# Altium PCB PCB1.PcbDoc
Units mm, origin at the board's own origin, x right, y up, seen from the top; angles counter-clockwise.
Board outline 57.53 x 48.39 mm, 2 copper layers (Top Layer, Bottom Layer); 25 components, 35 nets, 121 pads, 34 vias.
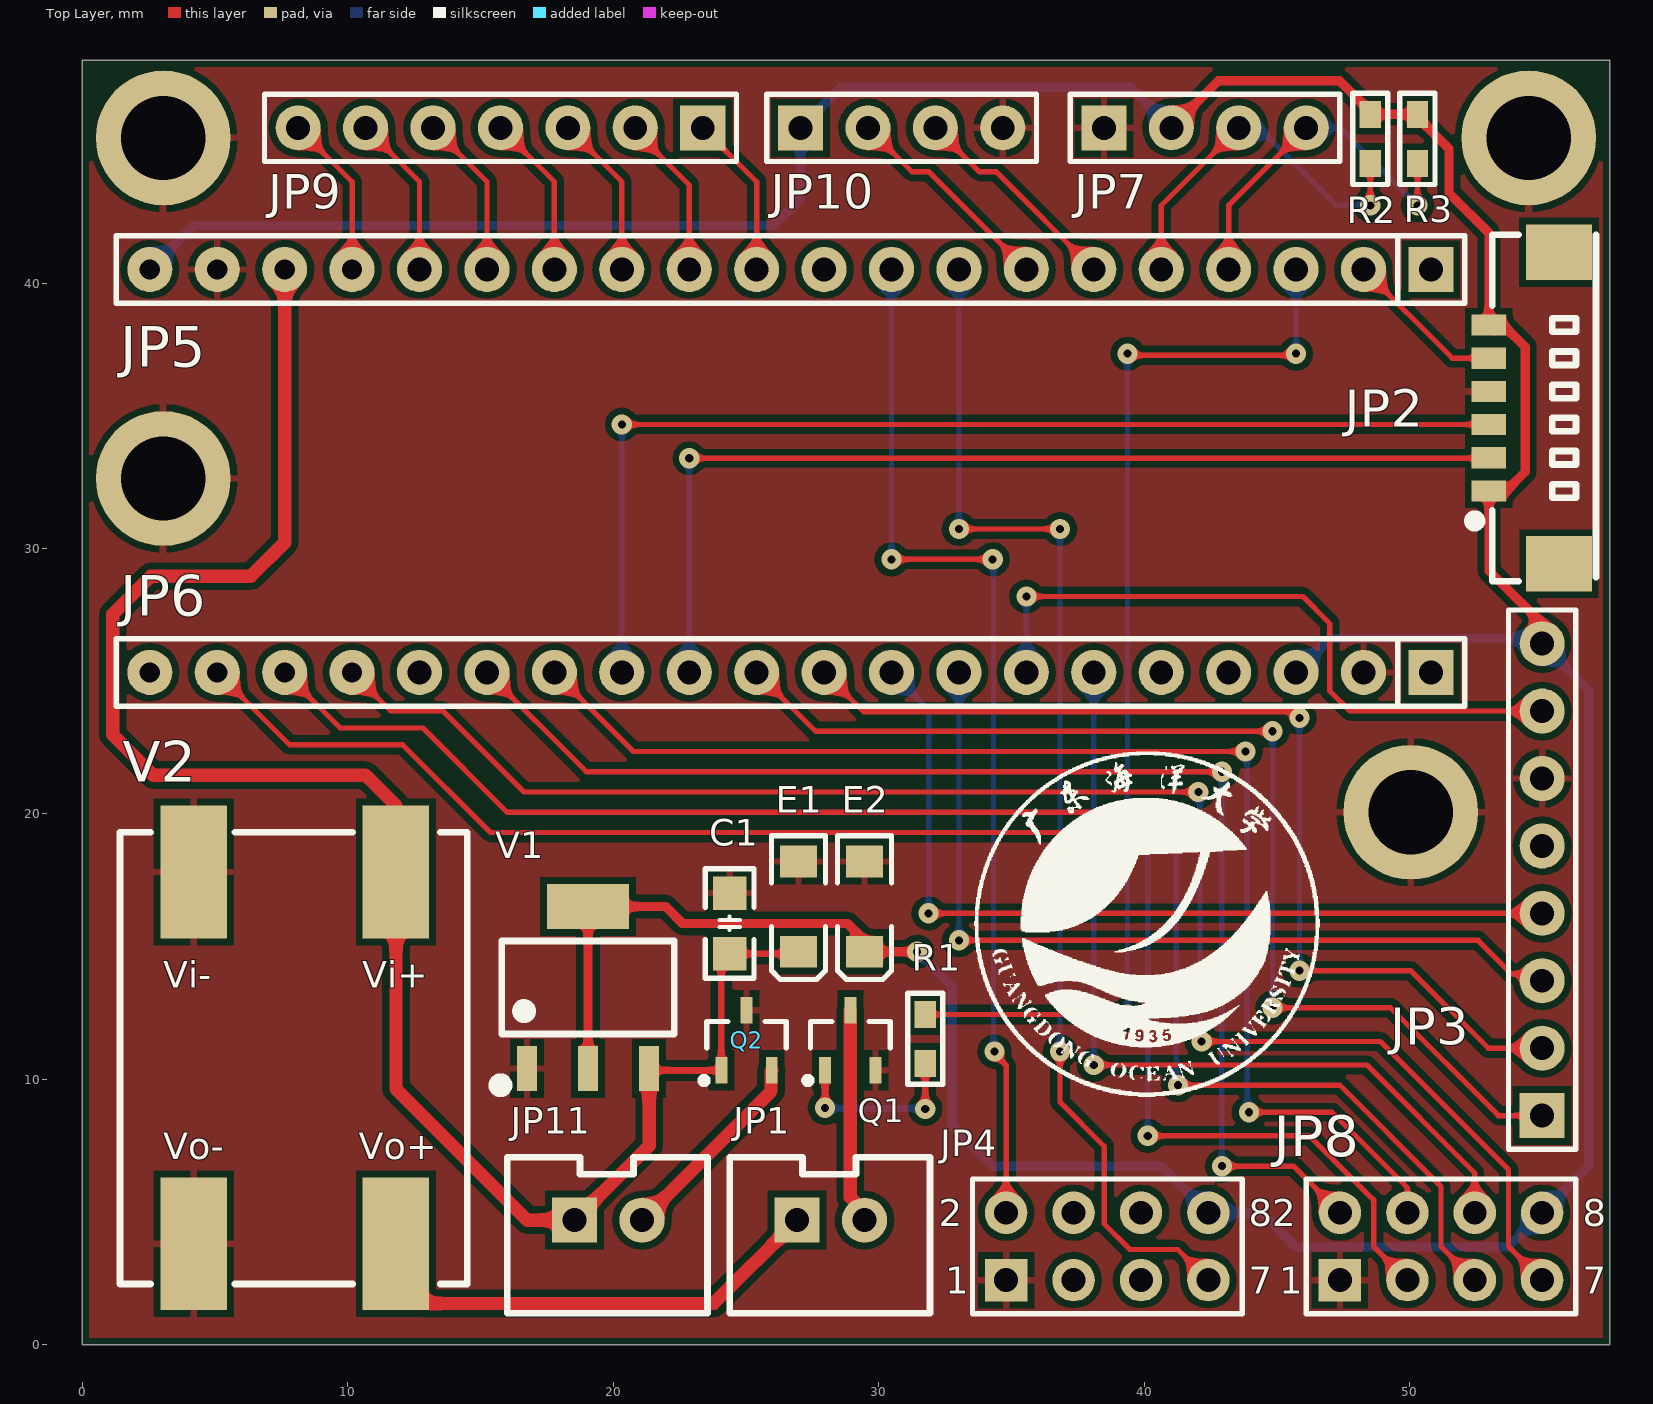
[diagram p0: Top Layer view]
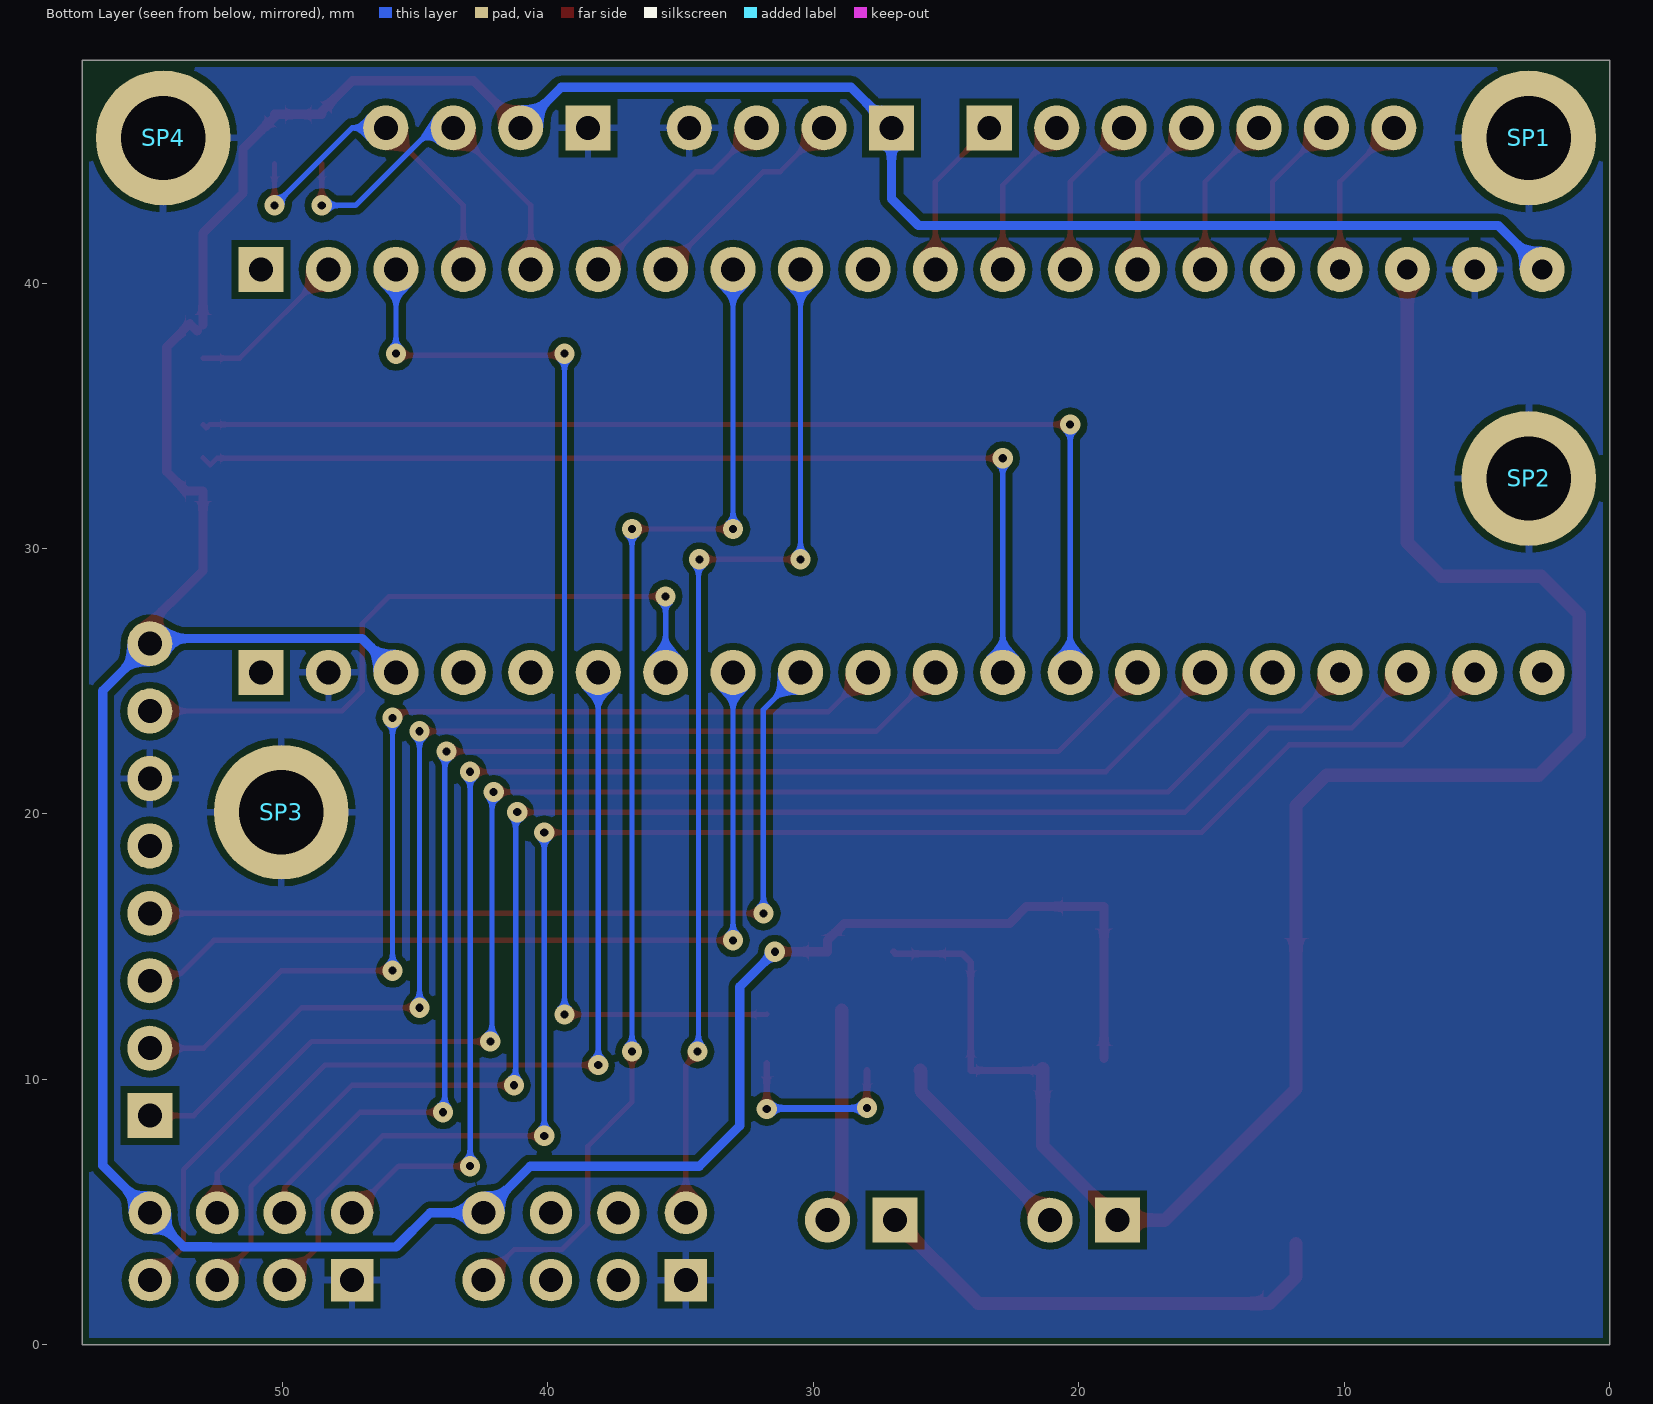
[diagram p1: Bottom Layer view, seen from below]

## Layer stack, top to bottom
Top Solder: solder mask 0.0102, Solder Resist, Dk 3.5
Top Layer: signal copper 0.0356
Dielectric 1: dielectric 0.32, FR-4, Dk 4.8
Bottom Layer: signal copper 0.0356
Bottom Solder: solder mask 0.0102, Solder Resist, Dk 3.5

## Board outline
0,0 57.531,0 57.531,48.387 0,48.387

## Design rules (kind name [scope] priority, off if disabled: settings)
BoardOutlineClearance [All] p1: gap=0.254 ignorepadtopadclearanceinfootprint=FALSE except(0: Arc-SplitContinuation Track-SplitContinuation SMDPad-SplitContinuation THPad-SplitContinuation Via-SplitContinuation Fill-SplitContinuation Poly-SplitContinuation Region-SplitContinuation Text-SplitContinuation)
Clearance [All] p1: gap=0.254 ignorepadtopadclearanceinfootprint=FALSE except(0: Arc-Hole Track-Hole SMDPad-Hole THPad-Hole Via-Hole Fill-Hole Poly-Hole Region-Hole Text-Hole)
PolygonConnect [All] p1: connectstyle=Relief reliefconductorwidth=0.254 reliefentries=4 polygonreliefangle="90 Angle" airgapwidth=0.254
RoutingVias [All] p1: holewidth=0.711 width=1.27 viastyle="Through Hole" minholewidth=0.711 minwidth=1.27 maxholewidth=0.711 maxwidth=1.27
SolderMaskExpansion [All] p1: expansion=0.102
Width [All] p1: maxlimit=0.5 minlimit=0.2 preferedwidth=0.254 minimp=50.000000 maximp=50.000000 favimp=50.000000
30 further rules are at their usual default settings.

## Components (designator, comment, footprint, x,y, rotation, side; value= is the part's Value field where it differs from the comment)
C1 "104" "C 0805_M" 24.384,15.875 r270 top
E1 "10uF/6.3V" "CD A(3216)" 26.974,16.51 r90 top
E2 "10uF/6.3V" "CD A(3216)" 29.464,16.51 r90 top
JP1 "HDR-1X2" XH2.54-LI-2P 28.194,4.699 r0 top
JP2 "HDR-1X6" "MX 1.25-LS-6P" 55.245,35.306 r90 top
JP3 "RC522" HDR2.54-LI-8P 54.991,17.526 r90 top
JP4 "Header 4X2" HDR2.54-LI-2x4P 38.608,3.707 r0 top
JP5 "HDR-1X20" HDR2.54-M-LI-20P 26.67,40.513 r180 top locked
JP6 "HDR-1X20" HDR2.54-M-LI-20P 26.67,25.333 r180 top locked
JP7 "HDR-1X4" HDR2.54-LI-4P 42.291,45.847 r0 top
JP8 "Header 4X2" HDR2.54-LI-2x4P 51.181,3.707 r0 top
JP9 "HDR-1X7" HDR2.54-M-LI-7P 15.748,45.847 r180 top
JP10 "HDR-1X4" HDR2.54-LI-4P 30.861,45.847 r0 top
JP11 "HDR-1X2" XH2.54-LI-2P 19.812,4.699 r0 top
Q1 "SI2302" SOT23-3L 28.929,11.484 r0 top
Q2 "SI2302" SOT23-3L 25.019,11.484 r0 top
R1 "1K" "R 0603_M" 31.75,11.526 r270 top
R2 "4.7K" "R 0603_M" 48.514,45.428 r270 top
R3 "4.7K" "R 0603_M" 50.292,45.428 r270 top
SP1 "M3铜柱" M3x5_ 3.048,45.466 r180 bottom
SP2 "M3铜柱" M3x5_ 3.048,32.639 r180 bottom
SP3 "M3铜柱" M3x5_ 50.038,20.066 r180 bottom
SP4 "M3铜柱" M3x5_ 54.483,45.466 r180 bottom
V1 "AMS1117-3V3" SOT223_L 19.05,13.462 r0 top
V2 "DCDC-0512-2w" DCDC-0512-2w 14.501,19.31 r270 top

## Footprints (in the part's own frame and the unit in brackets; to place one, negate y for a bottom-side part, rotate by r counter-clockwise, add the part's x,y. Pads: shape width x height; smd on the part's side, far side on the other; paste and mask are expansions set on the pad)
"C 0805_M" [mil] "无极性贴片电容"
  rect 50x50 smd: 1(-45,0) 2(45,0)
  silkscreen extent -81,-36 81,36, body extent -39,-24 39,24, height 20
"CD A(3216)" [mm] "长3.2mm，宽1.6mm，厚1.6mm"
  rect 1.2x1.4 smd: 1(-1.7,0) 2(1.7,0)
  silkscreen extent -2.74,-1.02 2.67,1.02, body extent -1.6,-0.8 1.6,0.8, height 1.6
DCDC-0512-2w [mm]
  rect 5x2.5 smd: 1(1.5,-10.31) 2(1.5,-2.69) 3(15.5,-2.69) 4(15.5,-10.31)
  silkscreen extent 0,-13.08 17.02,0
HDR2.54-LI-2x4P [mm] "双排排针，4x2脚"
  rect 1.6x1.6 hole 0.9: 1(-3.81,-1.27)
  round 1.6 hole 0.9: 2(-3.81,1.27) 3(-1.27,-1.27) 4(-1.27,1.27) 5(1.27,-1.27) 6(1.27,1.27) 7(3.81,-1.27) 8(3.81,1.27)
  silkscreen extent -5.08,-2.54 5.08,2.54, body extent -5.08,-2.54 5.08,2.54, height 8.5
HDR2.54-LI-4P [mm] "排针，4脚"
  rect 1.7x1.7 hole 0.9: 1(-3.81,0)
  round 1.7 hole 0.9: 2(-1.27,0) 3(1.27,0) 4(3.81,0)
  silkscreen extent -5.08,-1.27 5.08,1.27, body extent -5.08,-1.27 5.08,1.27, height 8.5
HDR2.54-LI-8P [mm] "排针，8脚"
  rect 1.7x1.7 hole 0.9: 1(-8.89,0)
  round 1.7 hole 0.9: 2(-6.35,0) 3(-3.81,0) 4(-1.27,0) 5(1.27,0) 6(3.81,0) 7(6.35,0) 8(8.89,0)
  silkscreen extent -10.16,-1.27 10.16,1.27, body extent -10.16,-1.27 10.16,1.27, height 8.5
HDR2.54-M-LI-7P [mm] "排母，7脚"
  rect 1.7x1.7 hole 0.9: 1(-7.62,0)
  round 1.7 hole 0.9: 2(-5.08,0) 3(-2.54,0) 4(0,0) 5(2.54,0) 6(5.08,0) 7(7.62,0)
  silkscreen extent -8.89,-1.27 8.89,1.27, body extent -8.89,-1.27 8.89,1.27, height 8.5
HDR2.54-M-LI-20P [mm] "排母，20脚"
  rect 1.7x1.7 hole 0.9: 1(-24.13,0)
  round 1.7 hole 0.9: 2(-21.59,0) 3(-19.05,0) 4(-16.51,0) 5(-13.97,0) 6(-11.43,0) 7(-8.89,0) 8(-6.35,0) 9(-3.81,0) 10(-1.27,0) 11(1.27,0) 12(3.81,0) 13(6.35,0) 14(8.89,0) 15(11.43,0) 16(13.97,0)
  round 1.7 hole 0.762: 17(16.51,0) 18(19.05,0) 19(21.59,0) 20(24.13,0)
  silkscreen extent -25.4,-1.27 25.4,1.27, body extent -25.4,-1.27 25.4,1.27, height 8.5
M3x5_ [mm] "M3铜柱，长：5mm"
  round 5.08 hole 3.175: 1(0,0)
  body extent -2.7,-2.35 2.7,2.35, height 5.05
"MX 1.25-LS-6P" [mm] "长：12.25m，宽：3.7mm，高：4.7mm"
  rect 2.1x2.5 smd: 0(-5.882,-0.381) 0(5.854,-0.381)
  rect 0.8x1.3 smd: 1(-3.139,2.261) 2(-1.889,2.261) 3(-0.639,2.261) 4(0.611,2.261) 5(1.861,2.261) 6(3.111,2.261)
  silkscreen extent -6.54,-1.78 6.52,2.99, body extent -6.32,-1.6 6.32,2.5, height 4.7
"R 0603_M" [mil] "1/10W贴片电阻"
  rect 40x31.5 smd: 1(-36.5,0) 2(36.5,0)
  silkscreen extent -68,-26 68,26, body extent -31,-16 32,16, height 16
SOT23-3L [mm] "3x1.3x1mm(长宽高)"
  rect 0.45x1 smd: 1(-0.95,-1.143) 2(0.95,-1.143) 3(0,1.125)
  silkscreen extent -1.72,-1.65 1.5,0.7, body extent -1.5,-1.2 1.5,1.2, height 1.05
SOT223_L [mm] "6.4x7x1.6mm(长宽高)"
  rect 0.75x1.7 smd: 1(-2.3,-3.048) 2(0,-3.048) 3(2.3,-3.048)
  rect 3.1x1.7 smd: 2(0,3.048)
  silkscreen extent -3.5,-3.88 3.25,1.75, body extent -3.25,-3.51 3.25,3.51, height 1.65
XH2.54-LI-2P [mm] "接插件，2P"
  rect 1.7x1.7 hole 0.9: 1(-1.27,0)
  round 1.7 hole 0.9: 2(1.27,0)
  silkscreen extent -3.81,-3.51 3.74,2.37, body extent -3.77,-3.3 3.77,2.4, height 7.05

## Part data
C1: library part C, "无极性贴片电容", BOM名称=无, 学习资源=www.oooc
E1 E2: library part C-CD, "贴片钽电容", BOM名称=Ì, 学习资源=www.oooc
JP1 JP11: library part "Header 2", "2P接插件", BOM名称=2P, 学习资源=www.oooc
JP2: library part "Header 6_1", "6P接插件", BOM名称=6P, 学习资源=www.oooc
JP4 JP8: "4*2P接插件", BOM名称=4*2P, 学习资源=www.oooc
JP5 JP6: library part "Header 20", "20P接插件", BOM名称=20P, 学习资源=www.oooc
JP7 JP10: library part "Header 4", "4P接插件", BOM名称=4P, 学习资源=www.oooc
JP9: library part "Header 7", "7P接插件", BOM名称=7P, 学习资源=www.oooc
Q1 Q2: "N沟道场效应管", BOM名称=N沟, 学习资源=www.oooc
R1 R2 R3: library part R, "贴片电阻", BOM名称=Ì, 学习资源=www.oooc
SP1 SP2 SP3 SP4: library part 铜柱小焊盘, "铜柱", 学习资源=www.oooc
V1: library part AMS1117, "三端稳压芯片", BOM名称=Î, 学习资源=www.oooc

## Via types
v1: diameter 0.762, hole 0.305, Top Layer to Bottom Layer, 34 vias

## Nets (pads, with @x,y where several pads share a name; then routed paths per layer and width w, separated by ;. In a path a pad name is that pad's centre, name@x,y a point inside that pad or via, vN(x,y) a via of type N, cw(c..) or ccw(c..) an arc to the next point about the centre after c; other vN are vias at no path point)
3.3v: E2.1 JP2.1 JP2.6 JP3.8 JP4.8 JP5.20 JP6.3 JP7.2 JP8.8 JP10.1 R2.1 R3.1 V1.2 | length 161.4
  Top Layer w0.35: V1.2@19.05,10.795 19.05,16.51 21.971,16.51 22.606,15.875 28.829,15.875 29.464,15.24 E2.1 v1(31.447,14.81) ; JP7.2 42.799,47.625 47.352,47.625 48.514,46.463 R2.1 R3.1 50.292,46.247 51.484,45.055 51.484,43.385 52.984,41.885 JP2.6 ; JP2.6@53.209,38.192 53.483,38.465 54.356,37.592 54.356,32.893 53.63,32.167 JP2.1 52.984,29.159 54.198,27.945 54.224,27.945 54.991,27.178 JP3.8
  Bottom Layer w0.35: JP5.20 4.191,42.164 26.035,42.164 27.051,43.18 JP10.1 28.575,47.371 39.497,47.371 JP7.2 ; v1(31.447,14.81) 32.766,13.491 32.766,8.255 34.29,6.731 40.664,6.731 JP4.8 44.426,4.977 45.72,3.683 52.69,3.683 52.705,3.698 53.712,3.698 JP8.8 56.769,6.755 56.769,24.638 JP3.8 54.795,26.612 46.999,26.612 JP6.3
5v: C1.2 E1.1 JP5.18 JP11.1 Q2.1 V1.3 V2.2 | length 70.4
  Top Layer w0.256: V1.3@21.423,10.341 Q2.1 24.069,14.417 C1.2 26.896,14.732 E1.1
  Top Layer w0.5: JP5.18 7.62,30.226 6.35,28.956 2.579,28.956 1.143,27.52 1.143,22.987 2.667,21.463 10.668,21.463 11.811,20.32 V2.2 11.811,9.652 16.764,4.699 JP11.1 21.35,7.507 V1.3 V1.3@21.423,10.341
12v: JP1.1 V2.3 | length 18.1
  Top Layer w0.5: V2.3 11.811,2.56 12.811,1.56 23.785,1.56 JP1.1
GND: C1.1 E1.2 E2.2 JP2.4 JP3.6 JP4.1 JP5.19 JP6.2 JP7.1 JP8.1 JP10.4 Q1.2 Q2.3 SP1.1 SP2.1 SP3.1 SP4.1 V1.1 V2.1 V2.4
NetJP1_2: JP1.2 Q1.3 | length 8.1
  Top Layer w0.5: Q1.3 28.929,5.559 29.464,5.024 JP1.2
NetJP11_2: JP11.2 Q2.2 | length 7.7
  Top Layer w0.5: JP11.2 25.944,9.561 25.944,10.316 Q2.2
NetQ1_1: Q1.1 R1.2 | length 6.9
  Top Layer w0.256: v1(27.979,8.929) Q1.1 ; v1(31.75,8.89) R1.2
  Bottom Layer w0.256: v1(27.979,8.929) 27.998,8.909 31.731,8.909 v1(31.75,8.89)
PA0: JP6.15 JP8.2 | length 49.3
  Top Layer w0.2: JP6.15 18.983,21.59 v1(42.926,21.59) ; v1(42.926,6.731) 45.617,6.731 JP8.2
  Bottom Layer w0.2: v1(42.926,6.731) v1(42.926,21.59)
PA1: JP6.14 JP8.4 | length 49
  Top Layer w0.2: JP6.14 20.761,22.352 v1(43.815,22.352) ; v1(43.942,8.763) 47.067,8.763 49.911,5.919 JP8.4
  Bottom Layer w0.2: v1(43.815,22.352) 43.878,22.288 43.878,8.826 v1(43.942,8.763)
PA2: JP2.3 JP6.13 | length 42.1
  Top Layer w0.2: v1(20.32,34.671) 52.734,34.671 52.861,34.544 JP2.3
  Bottom Layer w0.2: JP6.13 v1(20.32,34.671)
PA3: JP2.2 JP6.12 | length 38.4
  Top Layer w0.2: v1(22.86,33.401) 52.46,33.401 52.714,33.147 JP2.2
  Bottom Layer w0.2: JP6.12 v1(22.86,33.401)
PA4: JP3.1 JP6.11 | length 42.6
  Top Layer w0.2: JP6.11 27.619,23.114 v1(44.831,23.114) ; v1(44.831,12.7) 49.276,12.7 53.34,8.636 JP3.1
  Bottom Layer w0.2: v1(44.831,12.7) v1(44.831,23.114)
PA5: JP3.2 JP6.10 | length 38.5
  Top Layer w0.2: JP6.10 29.424,23.849 45.62,23.849 v1(45.847,23.622) ; v1(45.847,14.097) 50.038,14.097 52.959,11.176 JP3.2
  Bottom Layer w0.2: v1(45.847,14.097) v1(45.847,23.622)
PA6: JP3.4 JP6.9 | length 32.8
  Top Layer w0.2: v1(31.877,16.256) JP3.4
  Bottom Layer w0.2: JP6.9 31.877,23.936 v1(31.877,16.256)
PA7: JP3.3 JP6.8 | length 32.7
  Top Layer w0.2: v1(33.02,15.24) 52.578,15.24 53.841,13.977 54.73,13.977 JP3.3
  Bottom Layer w0.2: v1(33.02,15.24) JP6.8
PA8: JP5.5 JP7.3 R2.2 | length 14.2
  Top Layer w0.2: JP5.5 40.64,42.926 JP7.3 ; R2.2 48.514,43.18 v1@48.641,43.053
  Bottom Layer w0.2: JP7.3 44.323,45.847 47.244,42.926 v1(48.514,42.926)
PA9: JP5.6 JP10.3 | length 8.2
  Top Layer w0.2: JP10.3 33.782,44.196 34.417,44.196 JP5.6
PA10: JP5.7 JP10.2 | length 8.2
  Top Layer w0.2: JP10.2 31.242,44.196 31.877,44.196 JP5.7
PA11: JP4.7 JP5.8 | length 45.3
  Top Layer w0.2: v1(33.02,30.734) v1(36.83,30.734) ; v1(36.83,11.049) 36.83,9.144 38.492,7.482 38.492,4.561 39.462,3.591 41.264,3.591 JP4.7
  Bottom Layer w0.2: v1(33.02,30.734) JP5.8 ; v1(36.83,11.049) v1(36.83,30.734)
PA12: JP4.2 JP5.9 | length 39.6
  Top Layer w0.2: v1(30.48,29.591) v1(34.29,29.591) ; v1(34.356,11.049) 34.356,10.97 34.798,10.528 JP4.2
  Bottom Layer w0.2: v1(30.48,29.591) JP5.9 ; v1(34.29,29.591) 34.323,29.558 34.323,11.082 v1(34.356,11.049)
PB0: JP3.7 JP6.7 | length 25.6
  Top Layer w0.2: v1(35.56,28.194) 45.974,28.194 46.99,27.178 46.99,24.638 47.752,23.876 JP3.7
  Bottom Layer w0.2: JP6.7 v1(35.56,28.194)
PB1: JP6.6 JP8.6 | length 32.3
  Top Layer w0.2: v1(38.1,10.541) 48.387,10.541 52.451,6.477 JP8.6
  Bottom Layer w0.2: v1(38.1,10.541) JP6.6
PB3: JP5.11 JP9.1 | length 6.2
  Top Layer w0.2: JP9.1 25.4,43.815 JP5.11
PB4: JP5.12 JP9.2 | length 6.2
  Top Layer w0.2: JP9.2 20.828,45.72 22.86,43.688 JP5.12
PB5: JP5.13 JP9.3 | length 6.2
  Top Layer w0.2: JP9.3 20.32,43.815 JP5.13
PB6: JP5.14 JP9.4 | length 6.2
  Top Layer w0.2: JP9.4 17.78,43.815 JP5.14
PB7: JP5.15 JP9.5 | length 6.2
  Top Layer w0.2: JP9.5 15.24,43.815 JP5.15
PB8: JP5.16 JP9.6 | length 6.2
  Top Layer w0.2: JP9.6 12.7,43.815 JP5.16
PB9: JP5.17 JP9.7 | length 6.2
  Top Layer w0.2: JP9.7 10.16,43.815 JP5.17
PB13: JP2.5 JP5.2 | length 6.1
  Top Layer w0.2: JP5.2 51.606,37.167 JP2.5
PB14: JP5.3 R1.1 | length 42.1
  Top Layer w0.2: R1.1 31.757,12.446 v1(39.37,12.446) ; v1(39.37,37.338) 39.433,37.274 45.657,37.274 v1(45.72,37.338)
  Bottom Layer w0.2: v1(39.37,12.446) v1(39.37,37.338) ; v1(45.72,37.338) JP5.3
PB15: JP5.4 JP7.4 R3.2 | length 13.5
  Top Layer w0.2: JP5.4 43.18,42.926 JP7.4 ; v1(50.292,42.926) R3.2
  Bottom Layer w0.2: JP7.4 47.371,45.847 v1(50.292,42.926)
PC13: JP6.19 JP8.3 | length 62
  Top Layer w0.2: JP6.19 7.807,22.606 12.065,22.606 15.367,19.304 v1(40.132,19.304) ; v1(40.132,7.874) 46.228,7.874 48.641,5.461 48.641,3.707 JP8.3
  Bottom Layer w0.2: v1(40.132,7.874) v1(40.132,19.304)
PC14: JP6.18 JP8.5 | length 61.6
  Top Layer w0.2: JP6.18 9.712,23.241 12.827,23.241 16.002,20.066 v1(41.148,20.066) ; v1(41.275,9.779) 47.371,9.779 51.181,5.969 51.181,3.707 JP8.5
  Bottom Layer w0.2: v1(41.148,20.066) 41.212,20.002 41.212,9.842 v1(41.275,9.779)
PC15: JP6.17 JP8.7 | length 61.4
  Top Layer w0.2: JP6.17 11.617,23.876 13.589,23.876 16.637,20.828 v1(42.037,20.828) ; v1(42.164,11.43) 48.895,11.43 53.721,6.604 53.721,3.707 JP8.7
  Bottom Layer w0.2: v1(42.037,20.828) 42.1,20.764 42.1,11.493 v1(42.164,11.43)
pads on no net: JP2.0 JP3.5 JP4.3 JP4.4 JP4.5 JP4.6 JP5.1 JP5.10 JP6.1 JP6.4 JP6.5 JP6.16 JP6.20

## Polygon pours and split planes (outlines as drawn)
GND on Top Layer "Top Layer-GND" (solid, pour order 0): 0,48.387 0,0 57.531,0 57.531,48.387
GND on Bottom Layer "Bottom Layer-GND" (solid, pour order 2): 0,48.387 0,0 57.531,0 57.531,48.387

## Silkscreen, mask and mechanical layers (free items; w line width, h text height)
Top Overlay:
  drawing of 3030 lines, arcs and shapes, not listed
Mechanical 13:
  the board outline again, w0.254

## Text inside footprints (layer, text, board x,y; h text height)
JP4: Top Overlay "7" at 43.942,1.929 h1.02; Top Overlay "2" at 32.258,4.469 h1.02; Top Overlay "1" at 32.512,1.929 h1.02; Top Overlay "8" at 43.942,4.469 h1.02
JP8: Top Overlay "7" at 56.515,1.929 h1.02; Top Overlay "2" at 44.831,4.469 h1.02; Top Overlay "1" at 45.085,1.929 h1.02; Top Overlay "8" at 56.515,4.469 h1.02
V2: Top Overlay "Vo+" at 10.414,6.985 h1; Top Overlay "Vo-" at 3.048,6.985 h1; Top Overlay "Vi-" at 3.048,13.462 h1; Top Overlay "Vi+" at 10.541,13.462 h1